# Altium PCB New_Energizer_SMD.PcbDoc (part 2 of 2)
Units mm, origin at the board's own origin, x right, y up, seen from the top; angles counter-clockwise.
Board outline 230.98 x 169 mm, 2 copper layers (Top Layer, Bottom Layer); 143 components, 111 nets, 443 pads, 129 vias.
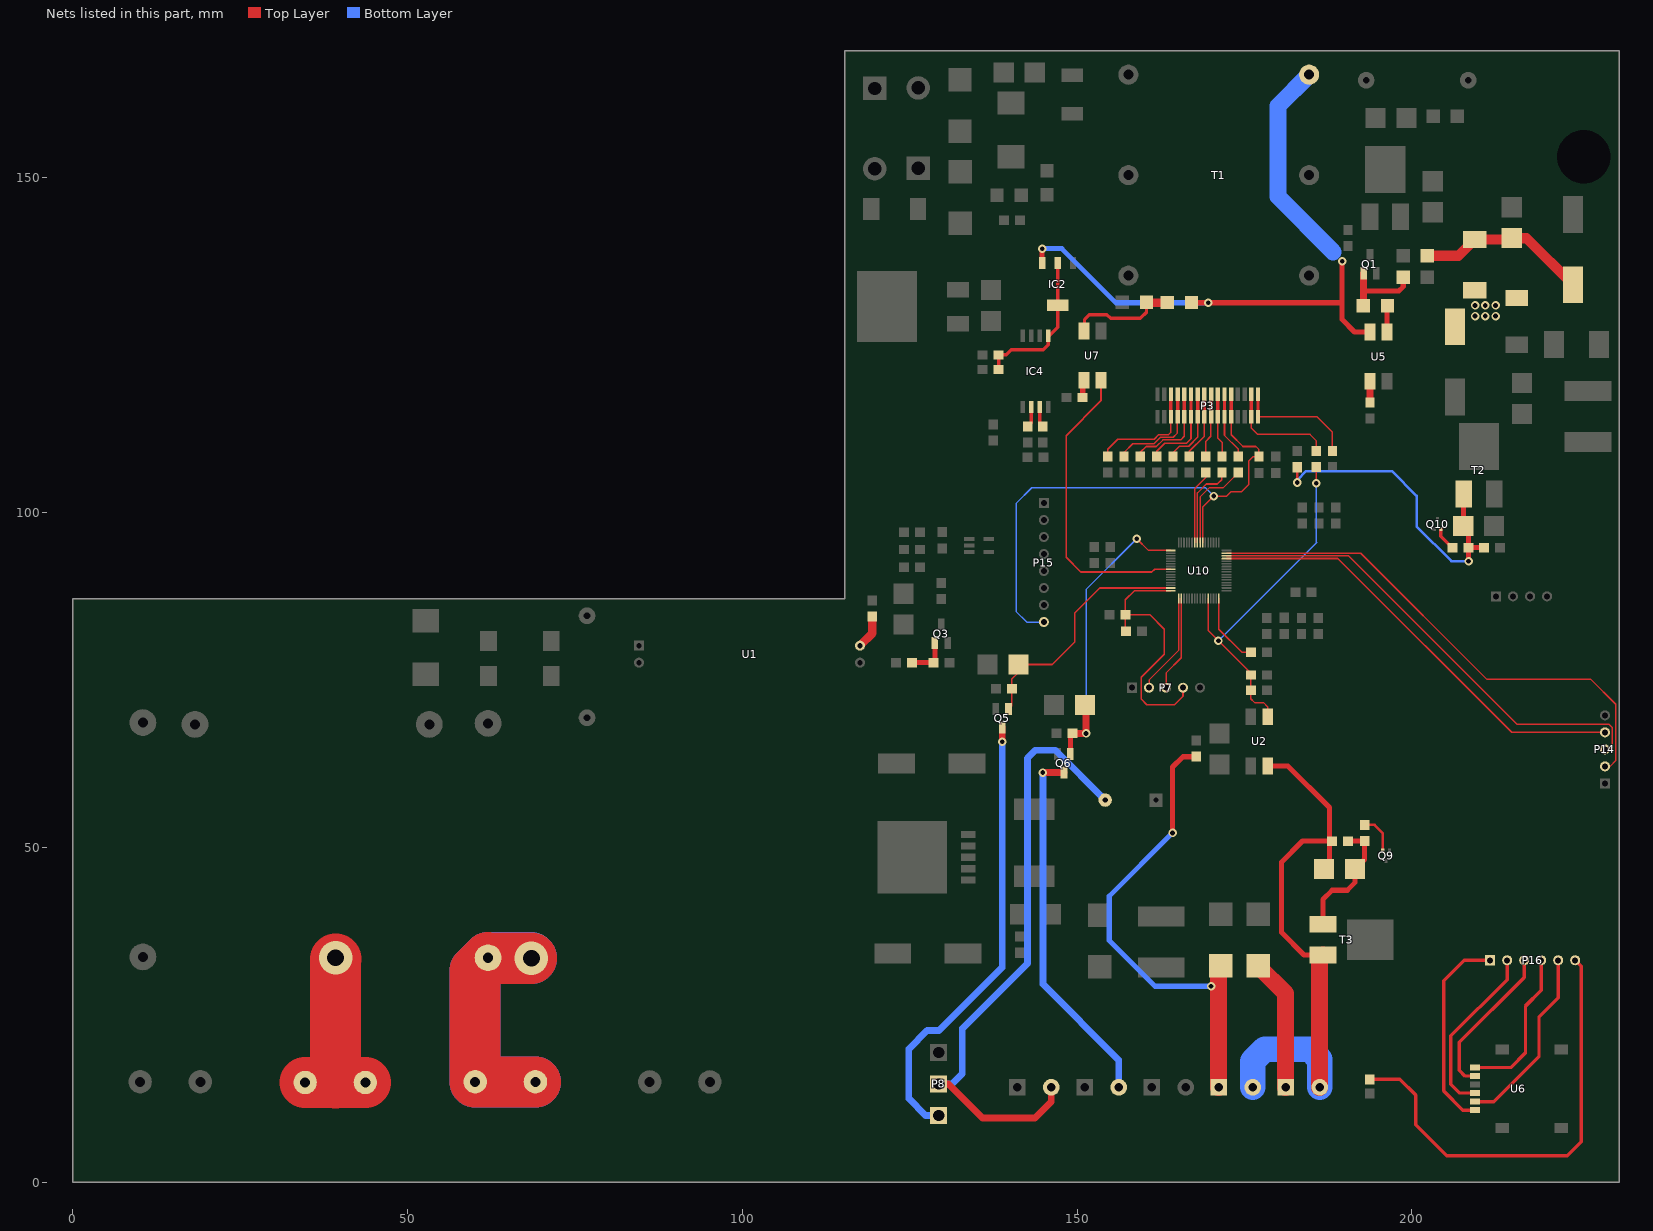
[diagram p2: the nets of this part, all layers, seen from the top]

## Via types
v1: diameter 1.27, hole 0.711, Top Layer to Bottom Layer, 125 vias
v2: diameter 5, hole 2.5, Top Layer to Bottom Layer, 4 vias

## Nets (pads, with @x,y where several pads share a name; then routed paths per layer and width w, separated by ;. In a path a pad name is that pad's centre, name@x,y a point inside that pad or via, vN(x,y) a via of type N, cw(c..) or ccw(c..) an arc to the next point about the centre after c; other vN are vias at no path point) (continued)
NetIC4_6: IC4.6 R59.1 | length 3.1
  Top Layer w0.508: R59.1@142.6,112.85 143.14,113.39 IC4.6@143.14,115.775
NetIC4_7: IC4.7 R58.1 | length 3.1
  Top Layer w0.508: IC4.7@144.41,115.775 144.41,113.29 R58.1@144.85,112.85
NetP3_3: P3.3 R36.2 | length 17.3
  Top Layer w0.229: R36.2@154.55,108.375 154.55,109.475 156.05,110.975 161.5,110.975 162.175,111.65 163.65,111.65 164,112 P3.3@164,114.315
  Top Layer w0.508: P3.3@164,114.315 P3.3@164,117.675
NetP3_4: P3.4 R35.2 | length 15.6
  Top Layer w0.229: R35.2@156.99,108.375 156.99,108.99 158.3,110.3 161.475,110.3 162.425,111.25 164.35,111.25 164.925,111.825 164.925,114.24 P3.4@165,114.315
  Top Layer w0.508: P3.4@165,114.315 P3.4@165,117.675
NetP3_5: P3.5 R34.2 | length 14.5
  Top Layer w0.229: R34.2@159.431,108.375 159.431,109.006 160.3,109.875 161.825,109.875 162.8,110.85 165.45,110.85 166,111.4 P3.5@166,114.315
  Top Layer w0.508: P3.5@166,114.315 P3.5@166,117.675
NetP3_6: P3.6 R32.2 | length 13.3
  Top Layer w0.229: R32.2@161.871,108.375 161.871,109.171 163.075,110.375 166.325,110.375 167,111.05 P3.6@167,114.315
  Top Layer w0.508: P3.6@167,114.315 P3.6@167,117.675
NetP3_7: P3.7 R31.2 | length 11.6
  Top Layer w0.229: R31.2@164.312,108.375 164.312,108.937 165.3,109.925 166.65,109.925 168,111.275 P3.7@168,114.315
  Top Layer w0.508: P3.7@168,114.315 P3.7@168,117.675
NetP3_8: P3.8 R30.2 | length 10.2
  Top Layer w0.229: R30.2@166.752,108.375 166.752,109.152 169,111.4 P3.8@169,114.315
  Top Layer w0.508: P3.8@169,114.315 P3.8@169,117.675
NetP3_9: P3.9 R14.2 | length 9.6
  Top Layer w0.229: R14.2@169.192,108.375 169.192,110.642 169.95,111.4 169.95,114.265 P3.9@170,114.315
  Top Layer w0.508: P3.9@170,114.315 P3.9@170,117.675
NetP3_10: P3.10 R13.2 | length 9.6
  Top Layer w0.229: P3.10@171,114.315 171,111.15 171.633,110.517 R13.2@171.633,108.375
  Top Layer w0.508: P3.10@171,114.315 P3.10@171,117.675
NetP3_11: P3.11 R8.2 | length 10.2
  Top Layer w0.229: P3.11@172,114.315 172,111.525 174.073,109.452 R8.2@174.073,108.375
  Top Layer w0.508: P3.11@172,114.315 P3.11@172,117.675
NetP3_15: P3.15 R45.2 | length 17.1
  Top Layer w0.229: P3.15@176,114.315 176,112.65 176.975,111.675 184.775,111.675 185.685,110.765 R45.2@185.685,109.2
  Top Layer w0.508: P3.15@176,114.315 P3.15@176,117.675
NetP3_16: P3.16 R29.2 | length 18.2
  Top Layer w0.229: P3.16@177,114.315 185.81,114.315 188.125,112 R29.2@188.125,109.2
  Top Layer w0.508: P3.16@177,114.315 P3.16@177,117.675
NetQ1_1: Q1.1 R1.1 R20.1 | length 12.5
  Top Layer w0.762: 192.75,133.225 192.85,133.125 198.075,133.125 198.7,133.75 R1.1@198.7,135.15
  Top Layer w1.016: R20.1@192.75,130.925 192.75,133.225 192.75,135.725 Q1.1@192.775,135.75
NetQ3_1: Q3.1 R18.1 R22.2 | length 6.2
  Top Layer w0.762: R18.1@125.35,77.575 125.375,77.6 R22.2@128.525,77.6 128.75,77.825 Q3.1@128.75,80.525
NetQ9_2: Q9.2 R49.2 | length 5.8
  Top Layer w0.381: R49.2@192.95,53.375 194.4,53.375 195.625,52.15 Q9.2@195.625,49.5
NetQ10_2: Q10.2 R53.2 | length 3.5
  Top Layer w0.508: Q10.2@204.325,97.55 204.325,96.475 R53.2@206.025,94.775
NetR4_2: R4.2 R53.1 R57.2 T2.1 Z1.2 | length 49.7
  Top Layer w0.381: v1(182.875,104.5) R57.2@182.875,106.775
  Top Layer w0.762: T2.1@207.714,102.8 207.714,98.089 Z1.2@207.65,98.025 208.425,97.25 R53.1@208.425,94.775 ; v1(208.45,92.75) 208.425,92.775 R53.1@208.425,94.775 ; R4.2@210.725,94.775 R53.1@208.425,94.775
  Bottom Layer w0.381: v1(182.875,104.5) 182.875,104.875 184.2,106.2 197,106.2 200.7,102.5 200.7,97.95 205.9,92.75 v1(208.45,92.75)
NetR7_1: R7.1 U1.4 | length 5.1
  Top Layer w1.27: U1.4@117.567,80.137 119.4,81.97 R7.1@119.4,84.5
NetR16_1: R16.1 U5.1 | length 3.2
  Top Layer w1.016: R16.1@193.725,116.475 193.73,116.48 U5.1@193.73,119.625
NetR20_2: R20.2 U5.3 | length 4.5
  Top Layer w0.762: U5.3@196.27,126.975 196.27,130.845 R20.2@196.35,130.925 R20.2@196.35,131.425
NetR47_2: R47.2 R49.1 T3.1 Z3.2 | length 19.6
  Top Layer w0.762: T3.1@187.005,38.791 T3.1@186.725,38.511 186.725,42.25 188.075,43.6 190.325,43.6 191.51,44.785 Z3.2@191.51,46.8 192.925,48.215 192.925,50.95 R47.2@190.425,50.95 R47.2@190.705,50.67
NetR54_1: R54.1 R56.2 U7.4 | length 16.6
  Top Layer w0.508: U7.4@151.005,127.125 151.1,127.22 151.1,128.85 151.825,129.575 154.425,129.575 155,129 159.45,129 160.35,129.9 R56.2@160.35,131.4
  Top Layer w1.27: R56.2@160.35,131.4 160.375,131.375 R54.1@163.475,131.375
NetR55_1: R55.1 U7.1 | length 2.6
  Top Layer w0.762: R55.1@150.825,117.2 150.825,119.595 U7.1@151.005,119.775
POWER_B: R14.1 U10.10 | length 11.1
  Top Layer w0.229: U10.10@167.55,95.52 167.55,103.6 169.192,105.242 R14.1@169.192,105.975
POWER_CHANGE_SW: C30.1 P3.12 P15.8 U10.7 | length 83
  Top Layer w0.229: U10.7@168.75,95.52 168.75,100.825 v1(170.4,102.475) 172.325,102.475 172.975,103.125 174.55,103.125 175.625,104.2 175.625,107.725 176.25,108.35 C30.1@177.15,108.35 177.15,109.425 176.7,109.875 174.75,109.875 173,111.625 P3.12@173,114.315
  Top Layer w0.508: P3.12@173,114.315 P3.12@173,117.675
  Bottom Layer w0.229: P15.8@145.025,83.655 142.47,83.655 140.875,85.25 140.875,101.375 143.225,103.725 169.15,103.725 v1(170.4,102.475)
POWER_G: R13.1 U10.9 | length 12.9
  Top Layer w0.229: U10.9@167.95,95.52 167.95,102.946 169.279,104.275 170.925,104.275 171.575,104.925 171.575,105.917 R13.1@171.633,105.975
POWER_R: R8.1 U10.8 | length 14
  Top Layer w0.229: U10.8@168.35,95.52 168.35,102.325 169.775,103.75 171.848,103.75 R8.1@174.073,105.975
PULSE: P12.1 P12.2 R15.1 | length 69.7
  Top Layer w7.62: v2(68.5,33.45) 62.1,33.45 R15.1@62.025,33.525 60.093,31.593 P12.1@60.093,14.997 P12.2@69.093,14.997
  Bottom Layer w7.62: v2(68.5,33.45) 68.425,33.525 R15.1@62.025,33.525 60.093,31.593 P12.1@60.093,14.997 P12.2@69.093,14.997
PULSE_RET: P10.1 P10.2 | length 27.5
  Top Layer w7.62: P10.1@34.7,14.9 39.25,14.9 ; 39.25,14.85 39.25,14.9 ; v2@39.275,33.325 39.25,33.3 39.25,14.9 ; P10.2@43.7,14.9 39.25,14.9
  other v2: 39.25,33.525
RESET: C12.2 P7.4 R42.2 U10.32 | length 39
  Top Layer w0.254: R42.2@157.3,82.3 157.2,82.4 C12.2@157.2,84.75 ; U10.32@163.98,88.35 158.55,88.35 157.2,87 C12.2@157.2,84.75 ; P7.4@165.815,73.85 165.815,72.615 164.525,71.325 160.4,71.325 159.55,72.175 159.55,75.4 163.025,78.875 163.025,82.6 160.875,84.75 C12.2@157.2,84.75
SIM_CLK: P16.3 U6.3 | length 23.1
  Top Layer w0.508: U6.3@209.4,15.86 207.915,15.86 207.075,16.7 207.075,20.9 216.75,30.575 P16.3@216.75,33.15
SIM_DATA: P16.4 U6.7 | length 23.3
  Top Layer w0.508: U6.7@209.4,17.13 214.755,17.13 216.95,19.325 216.95,26.318 219.29,28.658 P16.4@219.29,33.15
SIM_GND: P16.5 U6.5 | length 27.9
  Top Layer w0.508: U6.5@209.4,12.05 212.2,12.05 218.975,18.825 218.975,24.71 221.83,27.565 P16.5@221.83,33.15
SIM_NETLED: DS2.1 P16.6 | length 67.2
  Top Layer w0.508: DS2.1@193.715,15.375 198.2,15.375 200.55,13.025 200.55,8.575 205.175,3.95 223.175,3.95 225.275,6.05 225.275,32.245 P16.6@224.37,33.15
SIM_RST: P16.2 U6.2 | length 26.1
  Top Layer w0.508: U6.2@209.4,13.32 207.13,13.32 205.802,14.648 205.802,21.852 214.21,30.26 P16.2@214.21,33.15
SIM_VDD: P16.1 U6.1 | length 30.5
  Top Layer w0.508: U6.1@209.4,10.78 207.595,10.78 204.75,13.625 204.75,30.075 207.8,33.125 211.645,33.125 P16.1@211.67,33.15
SIM_WIFI_RESET: P14.4 U10.61 | length 67.3
  Top Layer w0.229: U10.61@172.32,93.15 188.925,93.15 214.889,67.186 P14.4@228.815,67.186
SIM_WIFI_RX: P14.3 U10.62 | length 72.3
  Top Layer w0.229: U10.62@172.32,93.55 190.52,93.55 215.645,68.425 229.395,68.425 229.933,67.887 229.933,65.088 229.491,64.646 P14.3@228.815,64.646
SIM_WIFI_TX: P14.2 U10.63 | length 77.9
  Top Layer w0.229: U10.63@172.32,93.95 192.345,93.95 211.145,75.15 226.67,75.15 230.445,71.375 230.445,62.975 229.576,62.106 P14.2@228.815,62.106
SIREN_OUT: P8.1 Q5.3 | length 67.8
  Top Layer w1.016: v1(138.8,65.784) Q5.3@138.8,67.925
  Bottom Layer w1.016: P8.1@129.3,9.975 127.35,9.975 124.85,12.475 124.85,19.9 127.6,22.65 129.375,22.65 138.8,32.075 v1(138.8,65.784)
SIREN_OUT_1: LS1.2 P4.2 P8.2 | length 92.6
  Top Layer w1.016: P8.2@129.3,14.675 130.775,14.675 135.85,9.6 143.7,9.6 146.14,12.04 P4.2@146.14,14.172
  Bottom Layer w1.016: P8.2@129.3,14.675 131.3,14.675 132.85,16.225 132.85,22.95 142.575,32.675 142.575,63.325 143.775,64.525 146.725,64.525 LS1.2@154.175,57.075
SIREN_RELAY: D17.2 Q5.1 R25.2 U10.31 | length 37.3
  Top Layer w0.254: Q5.1@139.75,70.675 140.25,71.175 R25.2@140.25,73.675 140.25,75.15 141.235,76.135 D17.2@141.235,77.325 146.275,77.325 149.637,80.687 149.637,85.012 153.375,88.75 U10.31@163.98,88.75
SPU+: D1.1 P1.1 R10.2 | length 70.4
  Top Layer w0.762: v1(164.25,52.175) 164.25,62 165.8,63.55 R10.2@167.775,63.55
  Top Layer w2.54: P1.1@171.135,14.172 171.135,31.985 D1.1@171.45,32.3
  Bottom Layer w0.762: v1@164.4,52.175 v1(164.25,52.175) 154.784,42.709 154.784,36.116 161.625,29.275 v1(170,29.275)
SPU-: P1.2 P5.2 R47.1 T3.3 U2.2 Z3.1 | length 87.3
  Top Layer w0.762: U2.2@178.47,62.175 181.45,62.175 187.675,55.95 R47.1@187.675,50.95 ; T3.3@186.725,33.939 183.886,33.939 180.5,37.325 180.5,47.8 183.65,50.95 R47.1@187.675,50.95 ; Z3.1@186.89,46.8 187.675,47.585 R47.1@187.675,50.95
  Top Layer w2.54: P5.2@186.215,14.172 186.215,33.429 T3.3@186.725,33.939
  Bottom Layer w3.81: P1.2@176.215,14.172 176.215,18.09 178,19.875 184.7,19.875 186.215,18.36 P5.2@186.215,14.172
SPU_AC+: D4.1 P5.1 | length 19.8
  Top Layer w2.54: D4.1@177.025,32.3 181.135,28.19 P5.1@181.135,14.172
SPU_IN: C15.2 R27.2 R45.1 U2.3 U10.44 | length 54.2
  Top Layer w0.229: U10.44@169.55,87.18 169.55,82.425 v1(171.1,80.875) 175.925,76.05 R27.2@175.925,75.75 C15.2@175.925,73.475 175.925,72.2 176.5,71.625 177.825,71.625 178.47,70.98 U2.3@178.47,69.525 ; R45.1@185.685,106.8 185.7,106.785 v1(185.7,104.4)
  Bottom Layer w0.229: v1(171.1,80.875) 185.775,95.55 185.7,95.625 v1(185.7,104.4)
STROBE: D3.2 Q6.1 R3.2 U10.17 | length 47.6
  Top Layer w0.229: v1(158.9,96.1) 160.65,94.35 U10.17@163.98,94.35
  Top Layer w0.762: Q6.1@148.975,63.925 148.975,66.7 R3.2@149.325,67.05
  Top Layer w1.016: R3.2@149.325,67.05 149.35,67.025 v1(151.325,67.025) 151.325,71.135 D3.2@151.16,71.3
  Bottom Layer w0.229: v1(151.325,67.025) 151.325,88.525 v1(158.9,96.1)
STROBE_OUT: P6.2 Q6.3 | length 54.8
  Top Layer w1.016: v1(144.875,61.175) Q6.3@148.025,61.175
  Bottom Layer w1.016: v1(144.875,61.175) 144.875,29.575 156.203,18.247 P6.2@156.203,14.172
SWCLK: P7.3 U10.34 | length 14.3
  Top Layer w0.229: P7.3@163.275,73.85 163.275,76.05 165.55,78.325 U10.34@165.55,87.18
SWDIO: P7.2 U10.33 | length 15.2
  Top Layer w0.229: P7.2@160.735,73.85 160.735,75.01 165.15,79.425 U10.33@165.15,87.18
TRAIC_FIRE: U7.2 U10.24 | length 45.3
  Top Layer w0.254: U7.2@153.545,119.775 153.545,116.695 148.35,111.5 148.35,93.325 150.544,91.131 161.156,91.131 161.575,91.55 U10.24@163.98,91.55
USB_VDD33: C21.2 U10.48 | length 10.8
  Top Layer w0.229: U10.48@171.15,87.18 171.15,82.6 174.575,79.175 C21.2@175.925,79.175
VCC_3V3: C32.2 C33.2 IC2.2 IC2.4 IC4.1 | length 23
  Top Layer w0.508: C32.2@138.275,121.375 138.275,123.525 C33.2@138.25,123.55 139.4,123.55 140.175,124.325 144.905,124.325 145.675,125.095 145.675,126.275 147.075,127.675 IC2.4@147.075,130.975 IC2.2@147.075,137.275
VCC_FILTERED: C2.1 R2.2 R6.2 ZD1.2 | length 25.7
  Top Layer w1.524: R2.2@202.3,138.375 206.95,138.375 R6.2@209.375,140.8 214.71,140.8 ZD1.2@214.9,140.99 217.11,140.99 C2.1@224.075,134.025
VCC_UNFIL: C1.1 D10.2 IC2.3 R6.1 R54.2 T1.1 U5.4 | length 98.3
  Top Layer w0.762: IC2.3@144.775,137.275 v1(144.775,139.425) ; R54.2@167.075,131.35 189.425,131.35 189.575,131.5 ; v1(189.6,137.55) 189.575,137.525 189.575,131.5 ; U5.4@193.73,126.975 191.425,126.975 189.575,128.825 189.575,131.5
  Bottom Layer w0.762: v1(144.775,139.425) 147.7,139.425 155.775,131.35 v1(169.575,131.35)
  Bottom Layer w2.54: T1.1@184.65,165.4 179.975,160.725 179.975,147.2 188.225,138.95
  other v1: 209.425,129.35 210.95,129.35 212.475,129.35 209.425,130.95 210.95,130.95 212.475,130.95
pads on no net: P8.3 P17.1 P17.2 P17.3 P17.4 T1.2 T1.5 U6.0 U6.6 U10.3 U10.5 U10.19 U10.20 U10.21 U10.25 U10.35 U10.36 U10.37 U10.38 U10.39 U10.40 U10.41 U10.45 U10.46 U10.47 U10.52 U10.55 U10.56 U10.60 U10.64

## Polygon pours and split planes (outlines as drawn)
BATT+ on Top Layer "BATT+_L01_P109" (solid, pour order 109): 178.95,38.075 179.325,38.45 179.275,38.5 179.275,42.75 178.275,43.75 170.275,43.75 169.175,42.65 169.175,38.475 169.575,38.075
LOAD- on Top Layer "LOAD-_L01_P044" (solid, pour order 44): 139.35,155.2 142.375,155.2 142.725,154.85 142.8,154.775 142.8,151.125 142.8,149.95 142.4,149.55 142.35,149.5 139.1,149.5 138.35,149.5 137.7,150.15 137.6,150.25 137.6,154.55 137.6,154.925 137.875,155.2
LOAD- on Top Layer "LOAD-_L01_P101" (solid, pour order 101): 205.15,106.125 214.775,106.125 214.775,115.95 214.575,115.95 205.15,115.95
BATT- on Top Layer "BATT-_L01_P100" (solid, pour order 100): 210.875,105.05 215.35,105.05 216.075,104.325 216.075,100.575 215.55,100.05 210.875,100.05 210.575,100.35 210.575,104.75
LOAD- on Top Layer "LOAD-_L01_P068" (solid, pour order 68): 130.525,129.9 133.9,129.9 134.425,129.375 134.4,129.35 134.4,125.375 133.85,124.825 133.825,124.8 131.1,124.8 130.6,124.8 130.1,125.3 129.925,125.475 129.925,129.325
NetD8_1 on Top Layer "NETD8_1_L01_P066" (solid, pour order 66): 131.1,159.05 134.375,159.05 134.425,159.05 134.725,158.75 134.725,149.175 134.725,149.025 134.45,148.75 130.925,148.75 130.675,148.75 130.375,149.05 130.25,149.175 130.25,158.7 130.55,159 130.6,159.05
NetD9_1 on Top Layer "NETD9_1_L01_P064" (solid, pour order 64): 124.525,153.575 128.3,153.575 128.55,153.325 128.675,153.2 128.675,149.125 128.675,145.95 129.275,145.35 134.425,145.35 134.8,144.975 134.8,141.525 134.8,141.35 134.4,140.95 130.375,140.95 128.65,140.95 127.9,140.2 127.8,140.1 127.8,139.288 121.488,139.288 121.475,139.3 124.125,141.95 124.125,143.525 124.125,153.175
NetD9_1 on Top Layer "NETD9_1_L01_P050" (solid, pour order 50): 118.525,139.288 127.8,139.288 127.8,122.113 117.125,122.113 117.125,139.288
LOAD- on Top Layer "LOAD-_L01_P048" (solid, pour order 48): 119.175,153.275 120.775,153.275 121.7,152.35 121.7,151.725 121.7,147.725 121.225,147.25 120.875,146.9 120.875,144.5 120.875,143.45 120.6,143.175 120.475,143.05 118.375,143.05 117.9,143.05 117.65,143.3 117.625,143.325 117.625,152.6 118.3,153.275
NetC5_1 on Top Layer "NETC5_1_L01_P042" (solid, pour order 42): 117.775,165.825 124.25,165.825 126.25,165.825 126.85,166.425 127.375,166.95 133.425,166.95 136.2,166.95 136.75,167.5 136.9,167.65 140.575,167.65 140.825,167.65 140.975,167.5 141.075,167.4 141.075,163.55 141.075,163.525 141.275,163.325 141.3,163.3 142.075,163.3 142.175,163.3 142.45,163.025 142.525,162.95 142.525,160.45 142.525,159.25 142.425,159.15 138.075,159.15 137.8,159.15 137.425,159.525 137.4,159.55 137.4,161.2 137.4,161.8 136.725,162.475 136.65,162.55 133.05,162.55 128.85,162.55 127.85,161.55 127.35,161.05 118.4,161.05 117.775,161.05 117.25,161.575 117.25,165.025 117.25,165.3
NetD6_2 on Top Layer "NETD6_2_L01_P040" (solid, pour order 40): 146.25,167.75 150.25,167.75 150.7,167.75 151.325,167.125 151.45,167 151.45,165.425 151.45,164.075 151.075,163.7 150.975,163.6 145.625,163.6 142.55,163.6 142.075,164.075 142.075,167.35 142.475,167.75
NetD6_1 on Top Layer "NETD6_1_L01_P038" (solid, pour order 38): 159.675,136.125 159.675,134.225 159.675,134.075 159.15,133.55 158.95,133.35 156.425,133.35 153.9,135.875 149.15,140.625 149.15,155.95 149.15,156.225 147.775,157.6 147.15,158.225 147.15,158.8 147.15,160.425 147.475,160.75 147.575,160.85 150.875,160.85 150.95,160.85 151.8,160 153.2,158.6 153.2,144.375 153.2,143 156.213,139.988 158.113,138.087 159.012,137.187 159.15,137.05 159.675,136.525
BATT- on Top Layer "BATT-_L01_P032" (solid, pour order 32): 121.375,56.7 130.65,56.7 130.65,39.525 119.975,39.525 119.975,56.7
VCC_FILTERED on Top Layer "Bottom Layer-No Net" (solid, pour order 24): 207.7,142.675 213.7,142.675 217.275,142.675 221.475,138.475 222.6,137.35 224.525,137.35 225.625,137.35 226.275,136.7 226.275,131.125 226.275,130.925 225.85,130.5 223.275,130.5 221.9,130.5 221.45,130.95 220.525,131.875 220.525,132.925 220.525,133.925 215.525,138.925 215.35,139.1 208.175,139.1 207.525,139.1 206.95,139.675 206.95,141.325 206.95,142.275 207.35,142.675
LOAD- on Top Layer "Bottom Layer-No Net" (solid, pour order 22): 197.025,146.35 201.175,146.35 201.475,146.65 201.5,146.675 205.025,146.675 206.05,146.675 206.475,147.1 206.475,154.125 206.475,154.225 206.475,155.125 206.475,156.075 205.625,156.925 205.625,159.275 205.625,165.3 206.45,166.125 209.65,166.125 210.45,165.003 210.45,145.15 209.6,144.2 206.45,144.2 205.9,143.65 205.9,143.025 205.5,142.625 201.85,142.625 201.125,142.625 200.425,141.925 199.875,141.375 197,141.375 196.95,141.375 196.6,141.725 196.575,141.75 196.575,144.675 196.575,145.925 197,146.35
NetD5_1 on Top Layer "Bottom Layer-No Net" (solid, pour order 16): 186.95,136.4 186.95,133.825 186.225,133.1 186.15,133.025 183.35,133.025 183.125,133.025 182.475,133.675 182.45,133.7 182.45,136.025 182.475,144.425 185.187,147.137 188.425,150.375 188.425,156.025 191.6,156.025 191.6,159.475 192.4,160.275 192.525,160.4 194.175,160.4 195.675,160.4 196.25,159.825 196.35,159.725 196.35,156.25 196.35,156.025 196.65,156.025 197.05,156.025 198.55,156.025 199.55,156.025 205.275,156.025 205.275,154.95 205.275,154.325 205.275,153.25 205.275,151.925 205.275,151.05 205.275,148.225 204.825,147.775 204.275,147.775 202.5,147.775 201.125,147.775 200.775,147.425 200.2,147.425 199.825,147.425 199.55,147.425 199.45,147.425 193,147.425 192.5,147.425 191.675,146.6 186.95,141.875 186.95,136.325
VCC_UNFIL on Top Layer "Bottom Layer-No Net" (solid, pour order 14): 207.125,136.125 211.2,136.125 213.55,133.775 213.575,133.75 217.075,133.75 217.35,133.75 217.925,133.175 217.975,133.125 217.975,130.925 217.975,130.575 217.675,130.275 217.625,130.225 215.625,130.225 213.825,130.225 213.3,129.7 213.3,128.975 212.8,128.475 210.225,128.475 209.125,128.475 208.775,128.125 208.775,125.5 208.775,124.85 208.35,124.425 208.325,124.4 204.825,124.4 204.45,124.4 204,124.85 203.875,124.975 203.875,128.275 203.875,130.575 204.425,131.125 206.45,133.15 206.45,135.45
LOAD+ on Top Layer "Bottom Layer-No Net" (solid, pour order 12): 223.15,126.2 223.15,127.3 222.85,127.6 222.8,127.65 220.525,127.65 219.475,127.65 219.35,127.525 218.475,126.65 217.375,126.65 213.225,126.65 213,126.425 212.55,125.975 212.55,123.75 212.55,118.125 213.075,117.6 218.625,117.6 219.275,118.25 219.375,118.35 219.375,121.425 219.375,121.9 219.925,122.45 219.95,122.475 222.2,122.475 222.675,122.475 223.15,122.95
NetF1_2 on Top Layer "Bottom Layer-No Net" (solid, pour order 10): 226.4,127.8 229.775,127.8 229.975,127.8 230.3,127.475 230.3,122.075 230.3,116.375 230.075,116.15 225.3,116.15 222.65,116.15 222.225,116.575 222.1,116.7 222.1,118.9 222.1,120.625 222.35,120.875 222.7,121.225 224.375,121.225 224.975,121.225 225.625,121.875 225.975,122.225 225.975,127.375
NetBR1_4 on Top Layer "NONET_L01_P-001" (solid, pour order 0): 51.2,77.7 55.6,77.7 55.9,77.7 56.3,77.3 56.375,77.225 61.1,77.225 63.45,77.225 63.75,76.925 63.775,76.9 63.775,72 63.775,70.475 64.45,69.8 64.5,69.75 64.5,68.175 64.5,67.35 63.675,66.525 63.4,66.25 61.1,66.25 51.725,66.25 51.025,66.95 50.35,67.625 50.35,69.375 50.35,77.4 50.65,77.7
BATT- on Top Layer "Bottom Layer-No Net" (solid, pour order 2): 160.05,43.75 166.1,43.75 166.65,43.75 167.35,43.05 167.425,42.975 167.425,40.55 167.425,38.325 167.1,38 164.425,38 158.225,38 157.825,38.4 157.825,38.5 157.825,42.375 157.825,42.95 158.625,43.75
BATT_A+ on Top Layer "Bottom Layer-No Net" (solid, pour order 4): 178.875,56.95 179.494,57.569 179.494,58.994 178.875,59.612 176.45,59.612 167.038,59.612 165.75,58.325 165.75,50.75 164.475,49.475 151.625,49.475 150,47.85 149.925,47.775 149.925,40.925 149.925,38.5 150.575,37.85 155.4,37.85 155.55,37.85 155.85,38.15 155.825,38.175 155.825,43.45 155.825,43.525 156.825,44.525 156.875,44.575 166.125,44.575 168.325,44.575 169.713,45.963 169.713,55.438 170.8,56.95 171.225,56.95 174.025,56.95
BATT_A+ on Top Layer "Bottom Layer-No Net" (solid, pour order 6): 222.825,112.575 228.95,112.575 229.05,112.575 229.3,112.575 229.8,112.075 229.8,109.325 229.8,106.5 228.9,105.725 222.975,105.725 222.4,105.725 221.625,106.5 221.6,106.525 221.6,111.825 221.6,112.075 222.1,112.575
BATT- on Top Layer "BATT-_L01_P070" (solid, pour order 70): 190.175,37.475 190.175,37.525 190.175,41.925 198.925,41.925 199.375,41.925 199.375,30.475 190.175,30.475
LOAD- on Top Layer "Bottom Layer-No Net" (solid, pour order 26): 223.575,141.35 225.425,141.35 225.825,141.35 226.425,141.95 226.55,142.075 226.55,145.2 226.55,147.75 225.925,148.375 220.35,148.375 210.05,148.375 209.725,148.05 209.475,147.8 209.475,145.45 209.475,144.325 209.6,144.2 212.875,144.2 213.15,143.925 213.2,143.875 217.4,143.875 220.85,143.875 221.4,143.875 221.85,143.425 222.075,143.2 222.075,142.3 222.075,141.8 222.525,141.35
SPU- on Top Layer "SPU-_L01_P111" (solid, pour order 111): 184.725,35.5 188.5,35.5 188.65,35.5 188.875,35.275 188.9,35.25 188.9,33.2 188.9,32.125 188.9,12.95 188.425,12.475 188.2,12.25 185.4,12.25 184.95,12.25 184.15,13.05 184,13.2 184,26.375 184,35.225 184.275,35.5
SPU_AC+ on Top Layer "SPU_AC+_L01_P113" (solid, pour order 113): 175.775,34.4 178.05,34.4 179.15,34.4 179.525,34.025 179.55,34 179.55,32.3 179.55,32.2 180.7,31.05 182.825,28.925 182.825,26.975 182.825,13.025 182.825,12.85 182.55,12.575 182.525,12.55 180.55,12.55 179.725,12.55 179.425,12.85 179.375,12.9 179.375,15 179.375,27.25 177.95,28.675 176.625,30 175.775,30 175.175,30 174.978,30.197 174.85,30.325 174.85,31.275 174.85,33.95 175.3,34.4
SPU+ on Top Layer "SPU+_L01_P115" (solid, pour order 115): 169.95,34.3 172.925,34.3 173.35,34.3 173.575,34.075 173.65,34 173.65,16.025 173.65,13.175 173,12.525 172.975,12.5 170.525,12.5 169.775,12.5 169.275,13 169.25,13.025 169.25,13.9 169.25,33.95 169.6,34.3
NetF3_1 on Top Layer "NETF3_1_L01_P117" (solid, pour order 117): 160.75,33.975 164.2,33.975 166.65,33.975 167.525,33.1 167.525,25.55 168.25,24.825 168.425,24.65 168.425,22.8 168.425,13.225 167.925,12.725 167.625,12.425 166.275,12.425 164.975,12.425 164.3,13.1 163.982,13.418 163.975,13.425 163.975,17.55 163.975,22.75 162.65,24.075 158.75,27.975 158.75,33.175 158.75,33.525 159.2,33.975
BATT+ on Top Layer "BATT+_L01_P119" (solid, pour order 119): 152.225,34.25 154.6,34.25 155.45,34.25 155.875,33.825 156.45,33.25 156.45,29.075 156.45,28.65 158.175,26.925 162.825,22.275 162.825,16.025 162.825,12.825 162.325,12.325 160.4,12.325 159.106,12.325 158.869,12.562 158.725,12.706 158.725,15.55 158.725,18.8 154.125,23.4 150.825,26.7 150.825,30.1 150.825,33.425 151.65,34.25
BATT- on Bottom Layer "Bottom Layer-No Net" (solid, remove dead copper, pour order 30): 230.975,0 117.05,0 117.05,1.875 117.05,72.025 116.275,72.8 115.325,73.75 115.325,116.325 199.2,116.325 199.2,110.125 204.363,104.963 230.975,104.963
LOAD- on Bottom Layer "LOAD-_L02_P105" (solid, pour order 105): 205.15,106.125 214.775,106.125 214.775,115.95 214.575,115.95 205.15,115.95
VCC_UNFIL on Bottom Layer "Bottom Layer-No Net" (solid, pour order 20): 184.15,167.175 186.075,167.175 186.175,167.175 186.75,166.6 186.85,166.5 186.85,164.825 186.85,163.875 183.25,160.275 181.875,158.9 181.875,151.45 181.875,148.725 186.65,143.95 189.1,141.5 200.675,141.5 201,141.5 210.375,132.012 210.708,131.675 212.85,131.675 213.3,131.225 213.3,129.2 213.3,128.975 212.8,128.475 208.275,128.475 206.55,130.2 203.65,133.1 199.825,136.925 196.4,136.925 187.35,136.925 180.6,143.675 177.9,146.375 177.9,161.95 177.925,161.95 183.15,167.175
BATT_A+ on Bottom Layer "Bottom Layer-No Net" (solid, pour order 8): 222.225,107.925 229.5,107.925 229.95,107.925 230.4,107.475 230.425,107.45 230.425,105.95 230.425,105.85 230.475,105.9 228.75,104.175 228.75,103.275 228.75,99.275 228.75,79.505 225.845,76.6 214.125,76.6 194.45,56.925 183.025,56.925 177.675,56.925 171.55,56.925 170.544,57.725 170.544,58.931 171.55,59.938 176.263,59.938 183.25,59.938 189.563,59.938 211.248,81.623 220.822,81.623 223.3,84.1 223.3,104.175 221.95,105.625 221.675,105.9 221.675,107.375
NetD9_1 on Bottom Layer "NETD9_1_L02_P060" (solid, pour order 60): 117.125,139.288 127.8,139.288 127.8,121.85 127.825,121.825 117.1,121.825
no net on Bottom Layer "NONET_L02_P097" (solid, pour order 97): 188.425,156.025 205.186,156.025 205.275,155.935 205.275,148.225 204.825,147.775 201.125,147.775 200.775,147.425 200.725,147.475 188.425,147.475
LOAD- on Bottom Layer "LOAD-_L02_P107" (solid, pour order 107): 115.325,169 230.975,169 230.975,109.325 219.3,109.325 216.1,106.125 205.15,106.125 203.775,107.5 203.775,122.175 200.375,125.575 192.75,125.575 192.75,126.225 188.275,130.7 188.225,130.65 153.925,130.65 148.175,124.9 115.325,124.9
no net on Top Solder "Top Layer-No Net" (solid): 205.15,106.125 214.775,106.125 214.775,115.95 214.575,115.95 205.15,115.95
no net on Top Solder "NONET_L01_P054" (solid, pour order 54): 118.525,139.288 127.8,139.288 127.8,122.113 117.125,122.113 117.125,139.288
BATT- on Top Solder "NONET_L01_P034" (solid, pour order 34): 121.375,56.7 130.65,56.7 130.65,39.525 119.975,39.525 119.975,56.7
no net on Top Solder "NONET_L01_P080" (solid, pour order 80): 190.175,37.475 190.175,37.525 190.175,41.925 198.925,41.925 199.375,41.925 199.375,30.475 190.175,30.475
NetD5_1 on Top Solder "BATT-_L01_P-001" (solid): 188.425,156.025 205.186,156.025 205.275,155.935 205.275,148.225 204.825,147.775 201.125,147.775 200.775,147.425 200.725,147.475 188.425,147.475
no net on Bottom Solder "NONET_L01_P103" (solid, pour order 103): 205.15,106.125 214.775,106.125 214.775,115.95 214.575,115.95 205.15,115.95
no net on Bottom Solder "NONET_L02_P062" (solid, pour order 62): 117.125,139.288 127.8,139.288 127.8,121.85 127.825,121.825 117.1,121.825
no net on Bottom Solder "NONET_L01_P052" (solid, pour order 52): 118.525,139.288 127.8,139.288 127.8,122.113 117.125,122.113 117.125,139.288
no net on Bottom Solder "NONET_L01_P036" (solid, pour order 36): 121.375,56.7 130.65,56.7 130.65,39.525 119.975,39.525 119.975,56.7
no net on Bottom Solder "NONET_L01_P078" (solid, pour order 78): 190.175,37.475 190.175,37.525 190.175,41.925 198.925,41.925 199.375,41.925 199.375,30.475 190.175,30.475
no net on Bottom Solder "BATT-_L01_P-001" (solid): 188.425,156.025 205.186,156.025 205.275,155.935 205.275,148.225 204.825,147.775 201.125,147.775 200.775,147.425 200.725,147.475 188.425,147.475

## Keep-outs
Keep-Out Layer:
  the board outline again, w0.254

## Other copper
Top Layer:
  region net VCC_UNFIL: 189.575,132.863 189.538,132.863 188,131.325 189.575,129.75
  region net NetBR1_1: 76.85,72.75 79.125,75.025 74.625,75.025
  region net 3V3: 138.675,57.625 140.55,55.75 140.525,55.75 138.675,53.9
  region net BATT_A+: 142.84,20.03 140.95,21.92 140.95,18.13
  region net BATT_A+: 148.9,36.038 147.075,34.213 146.975,34.213 146.975,34.188 148.9,32.263
  region net BATT_A+: 160.4,48.95 158,46.55 162.85,46.55
Bottom Layer:
  region net NetD9_1: 117.125,139.288 127.8,139.288 127.826,139.261 127.826,121.828 117.174,121.828
  region net NetD5_1: 188.425,156.025 205.185,156.025 205.275,155.935 205.275,148.225 204.825,147.775 201.125,147.775 200.775,147.425 188.475,147.425 188.425,147.475
  pour cut-out: 225.675,149.138 cw(c225.675,153.138) 221.675,153.138 cw(c225.675,153.138) 225.675,157.138 cw(c225.675,153.138) 229.675,153.138 cw(c225.675,153.138)
  pour cut-out: 181.975,75 ccw(c182.975,75) 183.975,75 183.975,78 ccw(c182.975,78) 181.975,78
  pour cut-out: 181.975,42 ccw(c182.975,42) 183.975,42 183.975,45 ccw(c182.975,45) 181.975,45

## Silkscreen, mask and mechanical layers (free items; w line width, h text height)
Top Overlay:
  lines w0.254: -0.025,28 230.975,28 ; 0.102,8.124 230.975,8.124 ; 181.727,5.639 cw(c182.743,5.639) 183.759,5.639 ccw(c184.775,5.639) 185.791,5.639
  text "FieldMaster_Energizer_GSM_V1.1" at 1.525,85.075 h1.02
  text "+" at 170.013,4.191 h3.81
  text "-" at 175.067,4.191 h3.81
  text "-" at 164.806,4.115 h3.81
  text "+" at 159.929,4.064 h3.81
  text "+" at 139.922,3.988 h3.81
  text "-" at 144.977,3.988 h3.81
  text "+" at 149.985,3.988 h3.81
  text "-" at 155.04,3.988 h3.81
  text "SIREN" at 140.35,1.3 h1.52
  text "STROBE" at 149.438,1.3 h1.52
  text "SPU" at 171.6,1.3 h1.52
  text "BATT" at 160.65,1.175 h1.52
  text "AC" at 182.4,1.175 h1.52
  text "FENCE" at 6.959,0.808 h3
  text "FENRET" at 30.934,0.808 h3
  text "ETHRET" at 81.925,0.775 h3
  text "EARTH" at 57.725,0.675 h3
  text "SIREN  / SW" at 124.225,0.275 h1.52
Bottom Overlay:
  text "FieldMaster_Energizer_GSM_V1.1" at 29.625,85.175 h1.02
Top Solder:
  region: 155.375,38 155.55,38.175 155.55,44.525 156.5,45.475 166.239,45.475 167.625,45.475 168.925,46.775 168.925,56.275 169.8,57.35 174.825,57.35 178.175,57.35 178.65,57.825 178.65,58.694 178.175,59.169 178.225,59.169 176,59.169 167.831,59.169 166.288,57.625 166.288,55.975 166.288,50.313 165,49.025 152.65,49.025 150.95,47.325 150.95,47.025 150.95,38.3 151.25,38
  region: 229.775,107.7 229.8,107.675 229.8,106.6 229.2,106 222.125,106 221.725,106.4 221.725,111.95 222.2,112.425 229.45,112.425 229.8,112.075
  region: 217.425,133.425 217.65,133.2 217.65,130.55 217.5,130.4 213.5,130.4 213.225,130.125 213.225,128.9 212.8,128.475 209.05,128.475 208.6,128.925 208.6,131.025 207.975,131.65 207.525,131.65 207.525,134.55 212.125,134.55 213.25,133.425
  lines w1.27: 130.85,126.65 133.424,126.65 ; 130.85,126.885 130.85,125.6 133.625,125.6 133.625,126.81 ; 132.238,125.6 132.238,128.198 ; 151.775,29.6 153.375,31.2 153.375,31.625 ; 153.025,31.475 154.925,29.575 ; 154.925,29.575 154.925,29.275 154.925,29.575
  lines w1.524: 216.2,115.5 216.525,115.175
  lines w1.778: 151.775,29.275 154.925,29.275 ; 153.125,31.875 153.375,31.625 153.375,27.925 161.135,20.165 161.135,14.172 ; 162.55,32.075 162.475,32 162.475,27.575 166.215,23.835 166.215,14.172 ; 171.025,40.425 171.45,40 171.6,40 ; 171.135,14.172 171.135,31.985 ; 177.025,32.3 177.025,31.875 181.135,27.765 181.135,14.172 ; 184.65,135.4 184.65,142.475 193.05,150.875 196.45,150.875 ; 186.215,14.172 186.215,33.429 186.375,33.589 ; 198.3,144.175 202.41,144.175 203.1,144.865 205.215,144.865 205.96,145.61 214.9,145.61 214.91,145.6 224.2,145.6 ; 207.5,154.675 207.5,152.975 209.4,152.975 209.4,154.675 ; 208.325,145.675 208.325,147.65 208.325,163.755 ; 209.35,115.05 209.6,114.8 ; 216.073,114.363 216.425,114.715 ; 216.65,119.4 216.075,119.975 216.075,124.75 215.7,125.125 221.2,125.125 ; 218.325,145.6 218.325,147.3 220.225,147.3 220.225,145.6 ; 227.9,125.125 227.9,118.325 227.925,118.3 ; 158.7,41.55 158.725,41.525 166.375,41.525 166.45,41.6 166.45,42.75 158.7,42.75 158.7,41.55
  lines w2.54: 119.761,163.347 126.18,163.347 126.257,163.424 126.924,163.424 128.175,164.675 132.5,164.675 133.25,165.425 138.475,165.425 138.625,165.575 ; 126.257,138.557 126.257,151.424 ; 143.66,165.75 144.11,165.3 149.275,165.3 ; 149.275,159.55 151.175,157.65 151.175,141.875 157.65,135.4 ; 209.85,109.65 209.85,113.825
Bottom Solder:
  region: 188.425,156.025 205.185,156.025 205.275,155.935 205.275,148.225 204.825,147.775 201.125,147.775 200.775,147.425 188.475,147.425 188.425,147.475
  lines w1.27: 209.425,130.35 209.625,130.15 212.475,130.15 ; 210.95,129.35 210.95,130.95 ; 209.425,129.35 212.475,129.35 212.475,130.95 209.425,130.95 209.425,129.35
  lines w1.778: 151.775,29.275 154.925,29.275 ; 153.375,29.275 153.55,29.275 157.575,25.25 174.45,25.25 177.275,28.075 177.275,42.875 171.325,42.875 ; 176.215,14.172 176.215,18.14 177.875,19.8 185.1,19.8 186.215,18.685 186.215,14.172 ; 222.525,106.8 228.925,106.8
  lines w2.54: 172.05,58.325 192.35,58.325 192.35,58.33 212.845,78.825 222.645,78.825 225.725,81.905 225.77,81.95 225.77,92.025 ; 184.65,165.4 179.875,160.625 179.875,147.525 188.475,138.925 200.95,138.925 209.425,130.45 209.425,130.35 ; 225.725,91.7 225.725,106.375
  lines w5.08: 4.85,33.65 10.475,33.65 ; 5,33.65 4.85,33.5 4.5,33.5 4.5,20.3 9.803,14.997 10.378,14.997 19.055,14.997 ; 68.525,33.5 68.5,33.525 62.025,33.525 60.093,31.593 60.093,14.997 69.093,14.997
Mechanical 1:
  lines w2: 136.4,118.775 144.375,118.775 148.55,122.95 154.15,122.95 ; 159.575,123.19 180.05,123.19 ; 180,123.19 181.36,123.19 184.125,120.425 ; 182.975,42 182.975,45 ; 182.975,75 182.975,78
  lines w3.5: 3.1,49.15 3.1,55.575 ; 4.35,44.7 15.8,44.7 23.9,36.6 ; 4.675,60.375 23.475,60.375 28.75,65.65 28.75,76.025 28.675,76.1 ; 17.925,49.15 17.925,55.575 ; 26.75,7 26.75,30 ; 30.625,60.775 39,60.775 ; 33.1,75.675 37.25,75.675 ; 41.5,75.95 41.5,64.475 46.675,59.3 73.2,59.3 ; 47.775,41.25 77.075,41.25 ; 51.575,7 51.575,30 ; 54.65,46.05 54.65,54.5 ; 69.4,46.25 69.4,54.5 ; 77.611,7 77.611,30 ; 94.95,83.625 104.575,74 ; 115.025,7 115.025,67.45

## Text inside footprints (layer, text, board x,y; h text height)
BR1: Top Overlay "+" at 70.527,73.482 h1.52 r270
D1: Top Overlay "+" at 173.175,29.175 h1.02 r90
D2: Top Overlay "+" at 150.625,30.45 h1.02 r90
D3: Top Overlay "+" at 143.675,70.8 h1.02
D4: Top Overlay "+" at 177.45,29.3 h1.02 r90
D5: Top Overlay "+" at 191.7,158.425 h1.02
D6: Top Overlay "+" at 148.425,157.275 h1.02 r90
D7: Top Overlay "+" at 146.5,167.65 h1.02 r180
D8: Top Overlay "+" at 132.925,153.975 h1.02 r90
D9: Top Overlay "+" at 132.975,140.2 h1.02 r90
D11: Top Overlay "+" at 137.6,125.775 h1.02 r90
D12: Top Overlay "+" at 171.75,59.525 h1.02 r90
D15: Top Overlay "+" at 138.575,39.525 h1.02
D17: Top Overlay "+" at 133.75,76.825 h1.02
D19: Top Overlay "+" at 216.925,111.85 h1.02 r90
D27: Top Overlay "+" at 124.55,80.4 h1.02 r90
DS2: Top Overlay "+" at 193.19,17.325 h1.02 r270
LS1: Top Overlay "+" at 162.471,56.11 h2 r180
P2: Bottom Overlay "27" at 100.675,46 h1.3; Bottom Overlay "4" at 96.472,45.985 h1; Bottom Overlay "5" at 97.818,44.639 h1; Bottom Overlay "6" at 100.079,43.953 h1; Bottom Overlay "7" at 101.908,44.461 h1; Bottom Overlay "8" at 103.686,45.909 h1; Bottom Overlay "9" at 104.346,47.916 h1; Bottom Overlay "10" at 103.965,49.948 h1; Bottom Overlay "11" at 102.416,51.446 h1; Bottom Overlay "12" at 100.511,52.031 h1; Bottom Overlay "1" at 97.818,51.573 h1; Bottom Overlay "3" at 95.939,47.89 h1; Bottom Overlay "2" at 96.65,50.151 h1; Bottom Overlay "25" at 100.7,49.7 h1.3; Bottom Overlay "26" at 100.75,47.9 h1.3
U1: Top Overlay "C" at 114.478,80.594 h2 r270; Top Overlay "E" at 114.478,78.41 h2 r270; Top Overlay "K" at 85.471,78.384 h2 r270; Top Overlay "A" at 85.598,80.67 h2 r270
Z1: Top Overlay "+" at 215.135,98.525 h1.02 r180
Z3: Top Overlay "+" at 184.025,46.3 h1.02
ZD1: Top Overlay "+" at 214.4,148.475 h1.02 r270
ZD7: Top Overlay "+" at 203.6,142 h1.02 r90